# Altium PCB VIDCEnhancer.PcbDoc
Units mil, origin at the board's own origin, x right, y up, seen from the top; angles counter-clockwise.
Board outline 2006.01 x 1403.61 mil, 2 copper layers (Top, Bottom); 17 components, 26 nets, 80 pads, 0 vias.
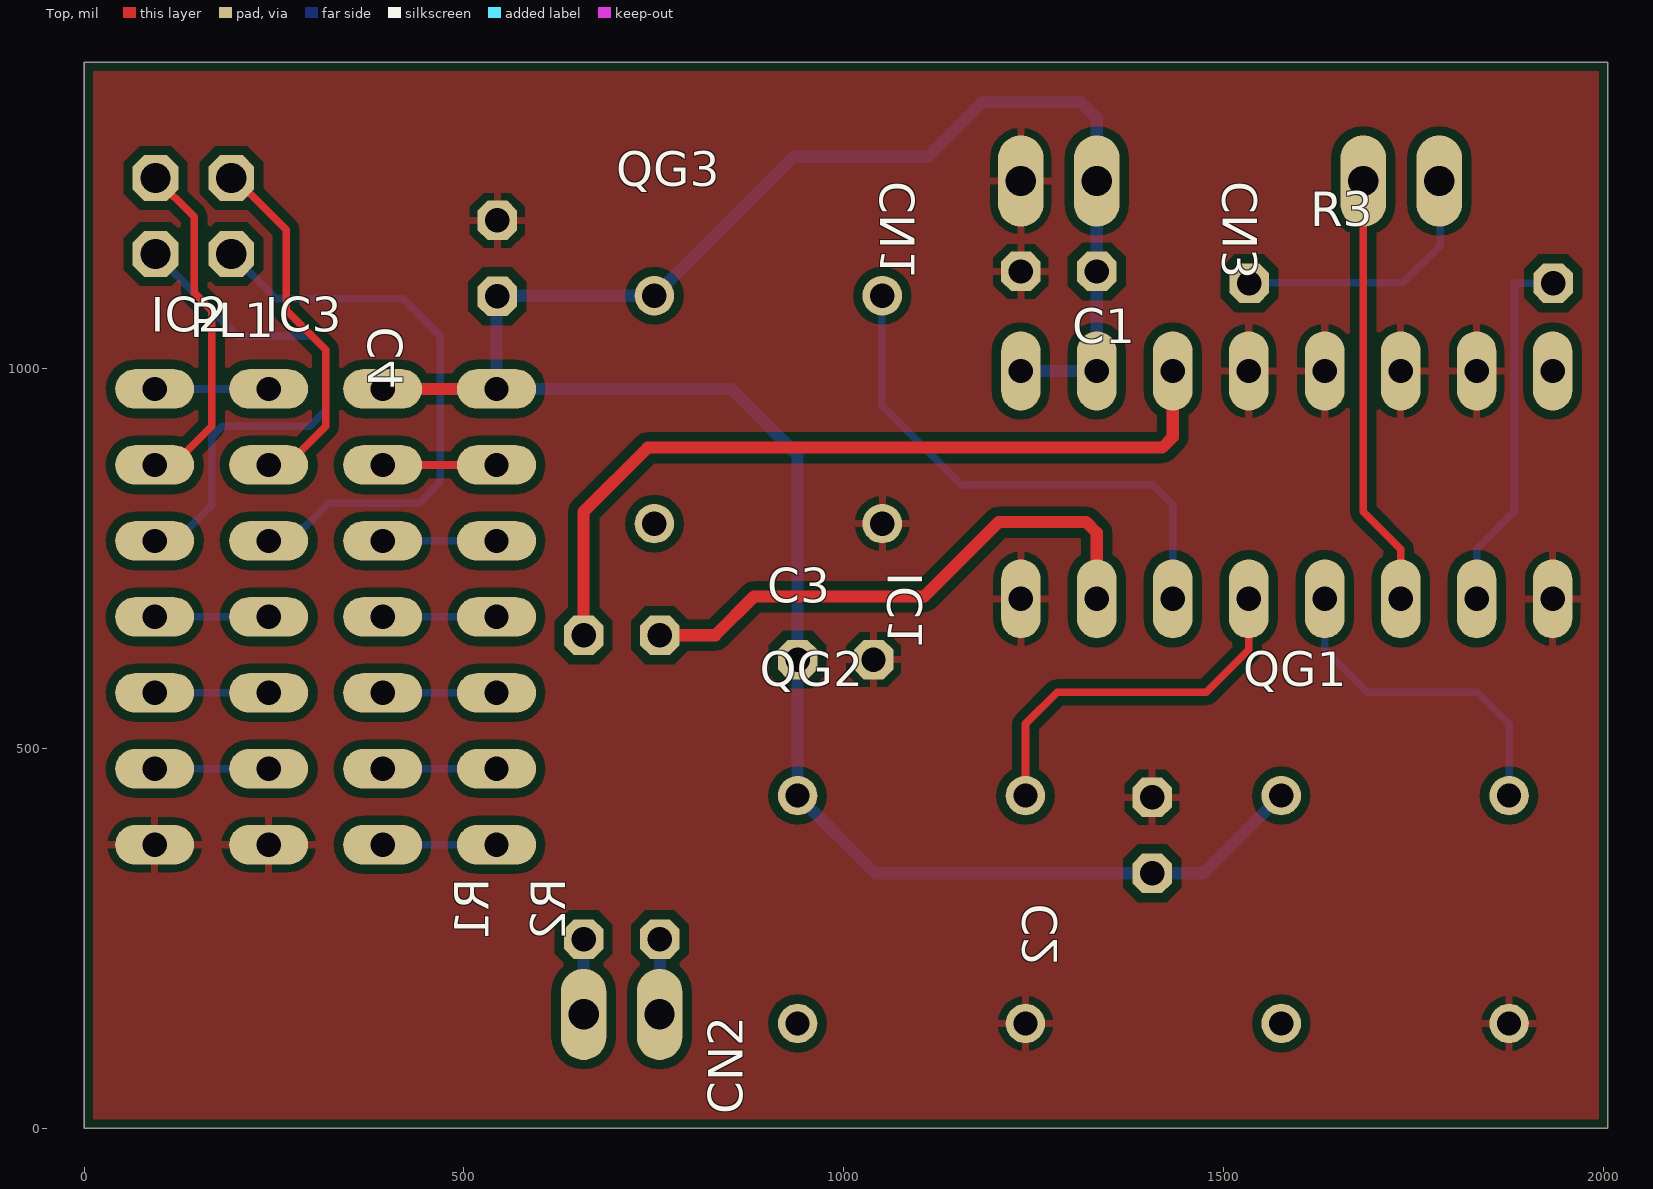
[diagram p0: Top view]
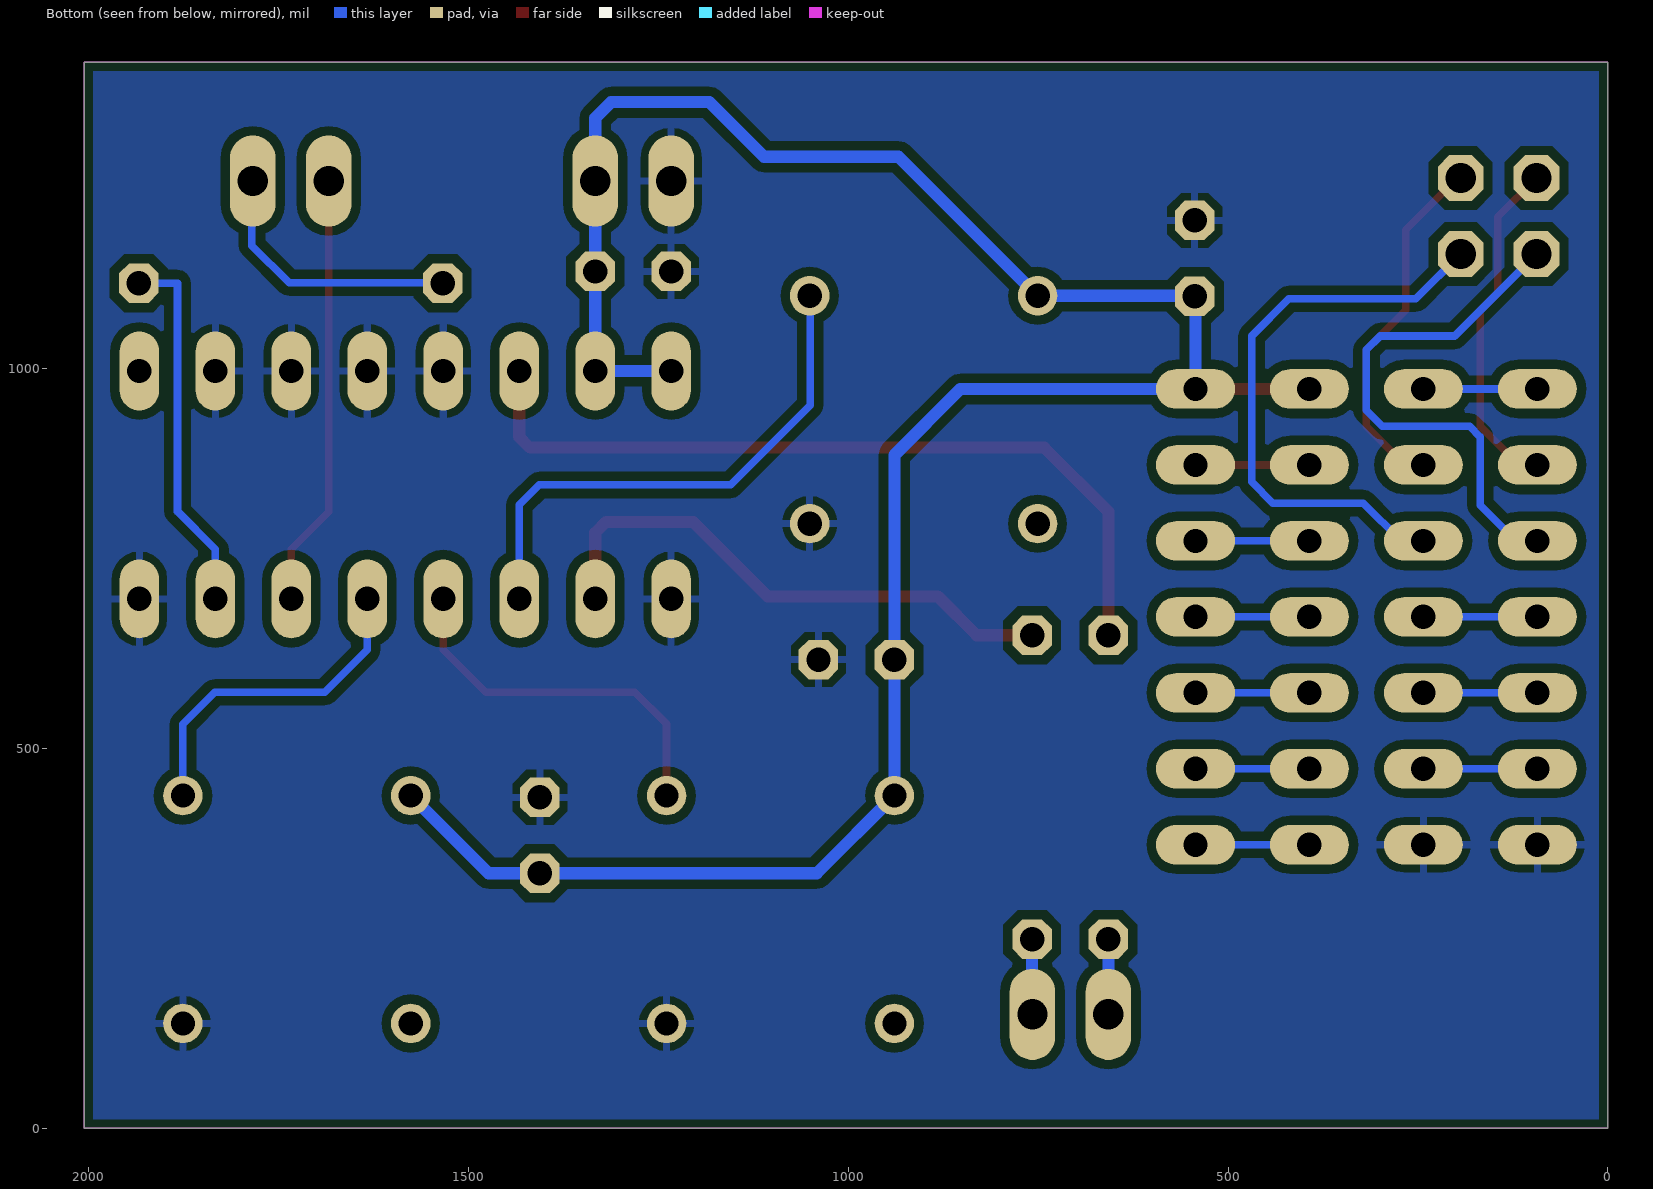
[diagram p1: Bottom view, seen from below]

## Layer stack, top to bottom
Top Solder: solder mask 0.4, Solder Resist, Dk 3.5
Top: signal copper 1.378
Dielectric 1: dielectric 12.6, FR-4, Dk 4.8
Bottom: signal copper 1.378
Bottom Solder: solder mask 0.4, Solder Resist, Dk 3.5

## Board outline
0,1403.61 0,0 2006.01,0 2006.01,1403.61

## Design rules (kind name [scope] priority, off if disabled: settings)
BoardOutlineClearance mdCopperDimension [All] p1: gap=10 ignorepadtopadclearanceinfootprint=FALSE except(0: Arc-SplitContinuation Track-SplitContinuation SMDPad-SplitContinuation THPad-SplitContinuation Via-SplitContinuation Fill-SplitContinuation Poly-SplitContinuation Region-SplitContinuation Text-SplitContinuation)
Clearance Clearance_for_PolygonClass_Isolate_12 [InPolygonClass('Isolate_12') vs IsArc Or IsTrack Or IsPad Or IsVia Or IsFill Or IsRegion Or IsText] p1: gap=12 ignorepadtopadclearanceinfootprint=FALSE
Clearance "Clearance (Same Net)" [All] p2: gap=8 ignorepadtopadclearanceinfootprint=FALSE
Clearance [All] p3: gap=8 ignorepadtopadclearanceinfootprint=FALSE
HoleSize [All] p1: absolutevalues=TRUE maxlimit=100000 minlimit=24 maxpercent=80.000 minpercent=20.000
HoleToHoleClearance mdDrill [All] p1: gap=8 allowstackedmicrovias=TRUE
MinimumSolderMaskSliver [All] p1 off: minsoldermaskwidth=10
PasteMaskExpansion mlMinCreamFrame [All] p1: expansion=0
PolygonConnect PolygonConnect_For_PolygonThermal_ON_Width100000_Gap100000 [InPolygonClass('PolygonThermal_ON_Width100000_Gap100000') vs Not IsVia] p1: connectstyle=Relief reliefconductorwidth=10 reliefentries=4 polygonreliefangle="90 Angle" airgapwidth=10
PolygonConnect ThermalVias [IsVia] p2: connectstyle=Direct reliefconductorwidth=10 reliefentries=4 polygonreliefangle="90 Angle" airgapwidth=10
PolygonConnect [All] p3: connectstyle=Relief reliefconductorwidth=10 reliefentries=4 polygonreliefangle="90 Angle" airgapwidth=10
RoutingVias [All] p1: holewidth=24 width=40 viastyle="Through Hole" minholewidth=24 minwidth=40 maxholewidth=100 maxwidth=100
SolderMaskExpansion mlMinStopFrame [All] p1: expansion=4 istentingtop=FALSE
Width [All] p1: maxlimit=10000 minlimit=10 preferedwidth=10
26 further rules are at their usual default settings.

## Classes and differential pairs
polygon class PolygonThermal_ON_Width100000_Gap100000: Polygon_1_Net_GND Polygon_2_Net_GND
polygon class Isolate_12: Polygon_1_Net_GND Polygon_2_Net_GND

## Components (designator, comment, footprint, x,y, rotation, side; value= is the part's Value field where it differs from the comment)
C1 "100nF" C025-025X050 1283.16,1128 r180 top
C2 "100nF" C025-025X050 1406,385.7 r90 top
C3 "100nF" C025-025X050 989.3,617 r0 top
C4 "100nF" C025-025X050 544,1145.21 r90 top
CN1 "Aux power" 1X02/90 1283.16,1397 r0 top
CN2 "Aux I/O" 1X02/90 707.57,0 r180 top
CN3 "VIDCclk" 1X02/90 1733.94,1397 r0 top
IC1 "74ACT153N" DIL16 1583.16,847 r0 top
IC2 "74LS05/SN7438" SOCKET-14 243,673.23 r270 top
IC3 "Riser connections" SOCKET-14 393,673.23 r270 top
PL1 "SYNC on GREEN" 2X02 144,1200.94 r180 top
QG1 "25.175MHz" DIL08S 1725.85,288 r0 top
QG2 "36.000MHz" DIL08S 1089.24,288 r0 top
QG3 "Custom" DIL08S 900.79,946 r0 top
R1 "68R" 0207/10 657.61,449 r90 top
R2 "68R" 0207/10 758,449 r90 top
R3 "68R" 0207/10 1734,1112.55 r0 top

## Footprints (in the part's own frame and the unit in brackets; to place one, negate y for a bottom-side part, rotate by r counter-clockwise, add the part's x,y. Pads: shape width x height; smd on the part's side, far side on the other; paste and mask are expansions set on the pad)
1X02/90 [mil] "1X02/90"
  oval 60x120 hole 40: 1(-50,-150) 2(50,-150)
  body extent -80,-210 80,-90, height 50
2X02 [mil] "2X02"
  oct 60x60 / inner round 55.43 / far side oct 60x60 hole 40: 1(-50,-50) 2(-50,50) 3(50,-50) 4(50,50)
  body extent -78,-78 78,78, height 150
0207/10 [mil] "0207/10"
  oct 52x52 / inner round 48.04 / far side oct 52x52 hole 32: 1(-200,0) 2(200,0)
  body extent -224,-24 224,24, height 150
C025-025X050 [mil] "C025-025X050"
  oct 52x52 / inner round 48.04 / far side oct 52x52 hole 32: 1(-50,0) 2(50,0)
  body extent -74,-24 74,24, height 150
DIL08S [mil] "DIL08S"
  round 52 hole 32: 1(-150,-150) 4(150,-150) 5(150,150) 8(-150,150)
  body extent -226,-226 176,176, height 150
DIL16 [mil] "DIL16"
  oval 52x104 hole 32: 1(-350,-150) 2(-250,-150) 3(-150,-150) 4(-50,-150) 5(50,-150) 6(150,-150) 7(250,-150) 8(350,-150) 9(350,150) 10(250,150) 11(150,150) 12(50,150) 13(-50,150) 14(-150,150) 15(-250,150) 16(-350,150)
  body extent -376,-202 376,202, height 50
SOCKET-14 [mil] "SOCKET-14"
  oval 52x104 hole 32: 1(-300,-150) 2(-200,-150) 3(-100,-150) 4(0,-150) 5(100,-150) 6(200,-150) 7(300,-150) 8(300,150) 9(200,150) 10(100,150) 11(0,150) 12(-100,150) 13(-200,150) 14(-300,150)
  body extent -326,-202 326,202, height 50

## Part data
C1 C2 C3 C4: library part C025-025X050, PackageName=C025-025X050
CN1 CN2 CN3: library part 1X02/90, PackageName=1X02/90
IC1: library part DIL16, PackageName=DIL16
IC2 IC3: library part SOCKET-14, PackageName=SOCKET-14
PL1: library part 2X02, PackageName=2X02
QG1 QG2 QG3: library part DIL08S, PackageName=DIL08S
R1 R2 R3: library part 0207/10, PackageName=0207/10

## Nets (pads, with @x,y where several pads share a name; then routed paths per layer and width w, separated by ;. In a path a pad name is that pad's centre, name@x,y a point inside that pad or via, vN(x,y) a via of type N, cw(c..) or ccw(c..) an arc to the next point about the centre after c; other vN are vias at no path point)
GND: C1.2 C2.2 C3.2 C4.2 CN1.1 IC1.1 IC1.8 IC1.10 IC1.11 IC1.12 IC1.13 IC2.7 IC3.7 QG1.4 QG2.4 QG3.4
N$1: IC1.5 QG1.5 | length 444.4
  Bottom w10: IC1.5 1633.16,630 1689.16,574 1834,574 1875.85,532.15 QG1.5
N$2: IC1.4 QG2.5 | length 495.6
  Top w10: QG2.5 1239.24,532.24 1281,574 1477,574 1533,630 1533,696.84 IC1.4
N$3: IC1.3 QG3.5 | length 705.4
  Bottom w10: QG3.5 1050,1091.67 1050,952 1155,847 1407,847 1433.16,820.84 IC1.3
N$4: IC1.7 R3.2 | length 487.2
  Bottom w10: IC1.7 1833.16,762.16 1883,812 1883,1112.55 R3.2
N$5: CN3.1 IC1.6 | length 570.4
  Top w10: CN3.1 1683.94,811.38 1733.16,762.16 IC1.6
N$6: CN2.2 R1.1 | length 99
  Bottom w16: CN2.2 R1.1
N$7: CN2.1 R2.1 | length 99
  Bottom w16: CN2.1 R2.1
N$8: IC2.3 PL1.4 | length 705
  Bottom w10: IC2.3 121.23,773.23 168,820 168,910 182,924 297,924 318,945 318,1025 300,1043 201.94,1043 PL1.4
N$9: IC1.2 R2.2 | length 729.7
  Top w16: R2.2 831,649 882,700 1106,700 1204,798 1319.16,798 1333.16,784 IC1.2
N$10: IC1.14 R1.2 | length 1065.9
  Top w16: R1.2 657.61,811.61 742,896 1419.16,896 1433.16,910 IC1.14
N$11: CN3.2 R3.1 | length 356.9
  Bottom w10: R3.1 1534.45,1113 1736,1113 1785,1162 1785,1245.94 CN3.2
N$12: IC2.6 IC3.6 | length 150
  Bottom w10: IC2.6 IC3.6
N$13: IC2.5 IC3.5 | length 150
  Bottom w10: IC2.5 IC3.5
N$14: IC2.4 IC3.4 | length 150
  Bottom w10: IC2.4 IC3.4
N$15: IC3.3 PL1.2 | length 769.9
  Bottom w10: PL1.2 252.94,1092 420,1092 469,1043 469,851 441,823 322,823 272.23,773.23 IC3.3
N$16: IC3.2 PL1.1 | length 476.7
  Top w10: PL1.1 198.06,1250.94 266,1183 266,1077 318,1025 318,924 267.23,873.23 IC3.2
N$17: IC2.1 IC3.1 | length 150
  Bottom w10: IC2.1 IC3.1
N$18: IC2.13 IC3.13 | length 150
  Top w10: IC2.13 IC3.13
N$19: IC2.12 IC3.12 | length 150
  Bottom w10: IC2.12 IC3.12
N$20: IC2.11 IC3.11 | length 150
  Bottom w10: IC2.11 IC3.11
N$21: IC2.10 IC3.10 | length 150
  Bottom w10: IC2.10 IC3.10
N$22: IC2.9 IC3.9 | length 150
  Bottom w10: IC2.9 IC3.9
N$23: IC2.8 IC3.8 | length 150
  Bottom w10: IC2.8 IC3.8
N$25: IC2.2 PL1.3 | length 453.6
  Top w10: IC2.2 117.23,873.23 168,924 168,1077 145,1100 145,1199.94 PL1.3
VCC: C1.1 C2.1 C3.1 C4.1 CN1.2 IC1.15 IC1.16 IC2.14 IC3.14 QG1.8 QG2.8 QG3.8 | length 3212.4
  Top w16: IC2.14 IC3.14
  Bottom w16: IC1.16 IC1.15 C1.1 CN1.2 1333.16,1330 1312.16,1351 1183,1351 1111,1279 933.79,1279 QG3.8 543,1096 IC3.14 852.56,973.23 939.3,886.49 C3.1 939.24,616.94 QG2.8 1041.54,335.7 C2.1 1473.55,335.7 QG1.8
pads on no net: IC1.9 QG1.1 QG2.1 QG3.1

## Polygon pours and split planes (outlines as drawn)
GND on Bottom "Polygon_1_Net_GND" (solid, remove dead copper, pour order 1): -5,1405 2014,1405 2014,-5 -5,-5
GND on Top "Polygon_2_Net_GND" (solid, remove dead copper, pour order 0): -5,1405 2014,1405 2014,-5 -5,-5

## Keep-outs
Keep-Out Layer:
  the board outline again, w0

## Silkscreen, mask and mechanical layers (free items; w line width, h text height)
Outline:
  lines w5: 0,0 2009,0 2009,1407 0,1407 0,0
Top Overlay (Mech9):
  drawing of 219 lines, arcs and shapes, not listed
  text "CN1" at 1109.69,1355.17 h34
  text "CN3" at 1553.36,1354.01 h34
  text "http://www.retro-kit.co.uk/" at 196,1337 h34
  text "PL1" at 57,1311.94 h34
  text "In" at 1575,1267 h34
  text "Out" at 1834,1267 h34
  text "C4" at 514.79,1255 h34
  text "GND" at 1099.36,1247.01 h34
  text "+5v" at 1400.36,1247.01 h34
  text "3/400" at 266,1232 h34
  text "QG3" at 966.79,1218 h34
  text "R3" at 1877,1159.45 h34
  text "C1" at 1391.84,1137 h34
  text "400/1" at 266,1134 h34
  text "IC2" at 51.77,1033 h34
  text "Custom" at 805,931 h34
  text "74ACT153" at 1470,889 h34
  text "1" at 790.79,735 h34
  text "IC1" at 1189.83,636.36 h34 r90
  text "C3" at 827.54,633.01 h34
  text "QG2" at 1155.24,553 h34
  text "QG1" at 1791.85,553 h34
  text "C2" at 1374.85,488 h34
  text "74LS05/SN7438" at 184,467 h30 r90
  text "R1" at 681.61,441 h34 r90
  text "R2" at 782,441 h34 r90
  text "Aux 2" at 455,280 h34
  text "1" at 791,280 h34
  text "36.000MHz" at 938,259 h34
  text "25.175MHz" at 1575,259 h34
  text "VIDC Enhancer &" at 21,210 h34
  text "Sync on Green fix" at 21,154 h34
  text "JLCJLCJLCJLC" at 1946,140 h23 r90
  text "v2.03 2013-01-09" at 21,98 h34
  text "1" at 979.24,70 h34
  text "1" at 1615.85,70 h34
  text "P. Vernon" at 21,42 h34
  text "CN2" at 508,13.58 h34

## Text inside footprints (layer, text, board x,y; h text height)
QG1: tPlace "1" at 1615.85,63 h77.5
QG2: tPlace "1" at 979.24,63 h77.5
QG3: tPlace "1" at 790.79,721 h77.5